# EAGLE board Habit-Reformer (EAGLE 7.3.0)
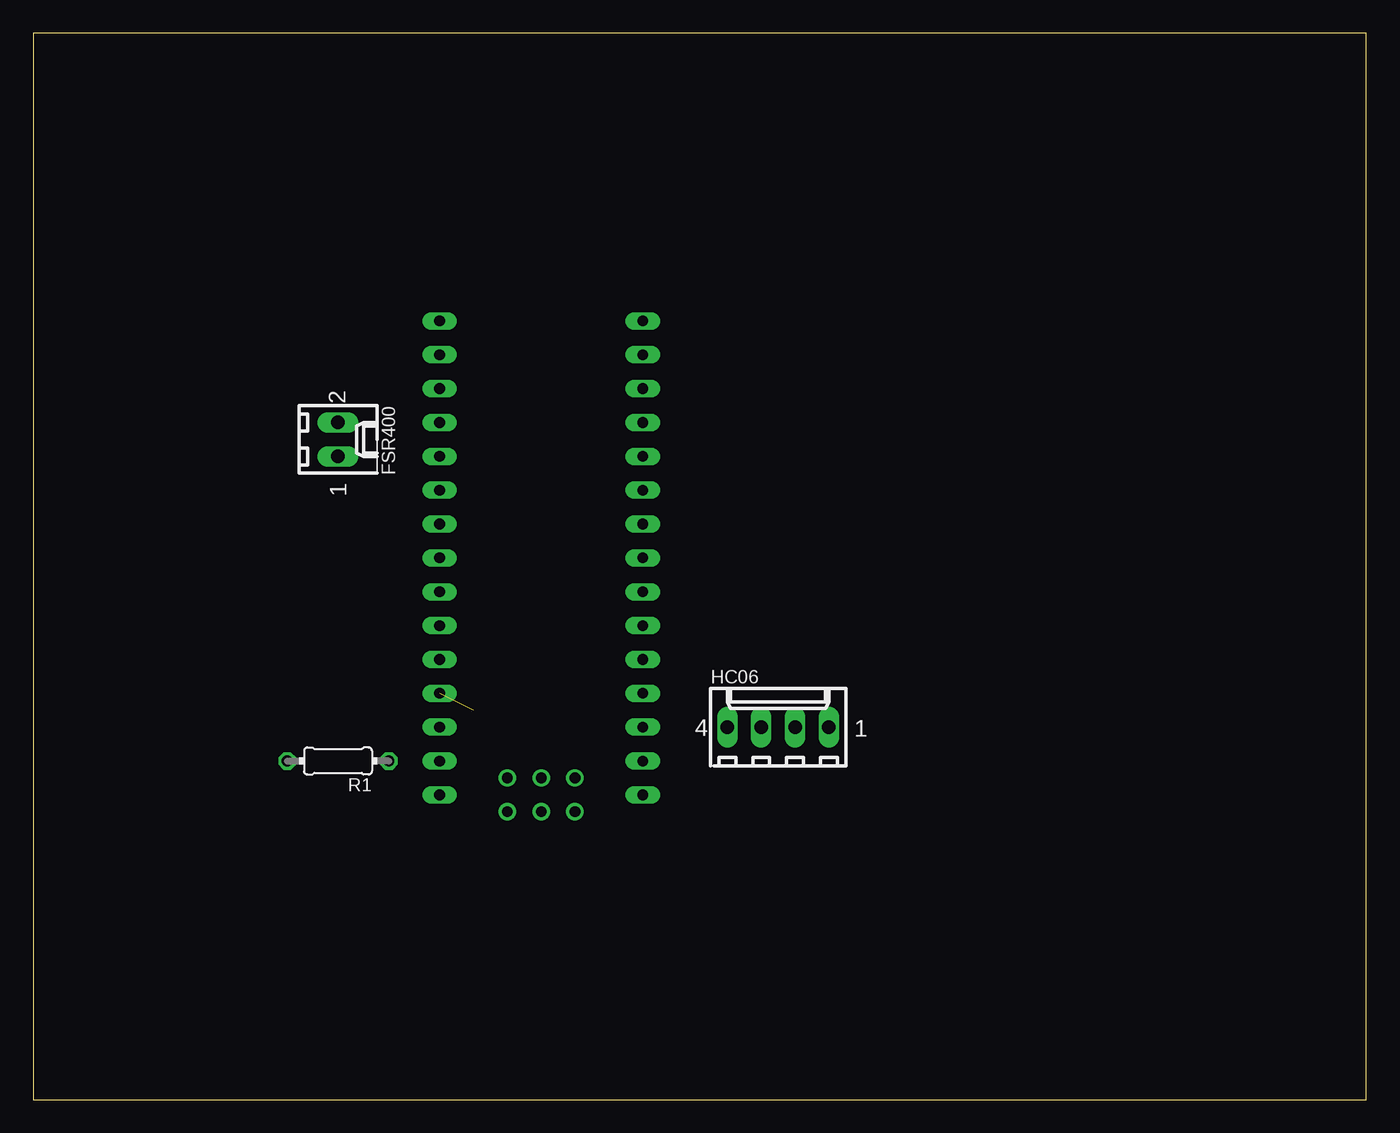
[diagram p0: board, top side]
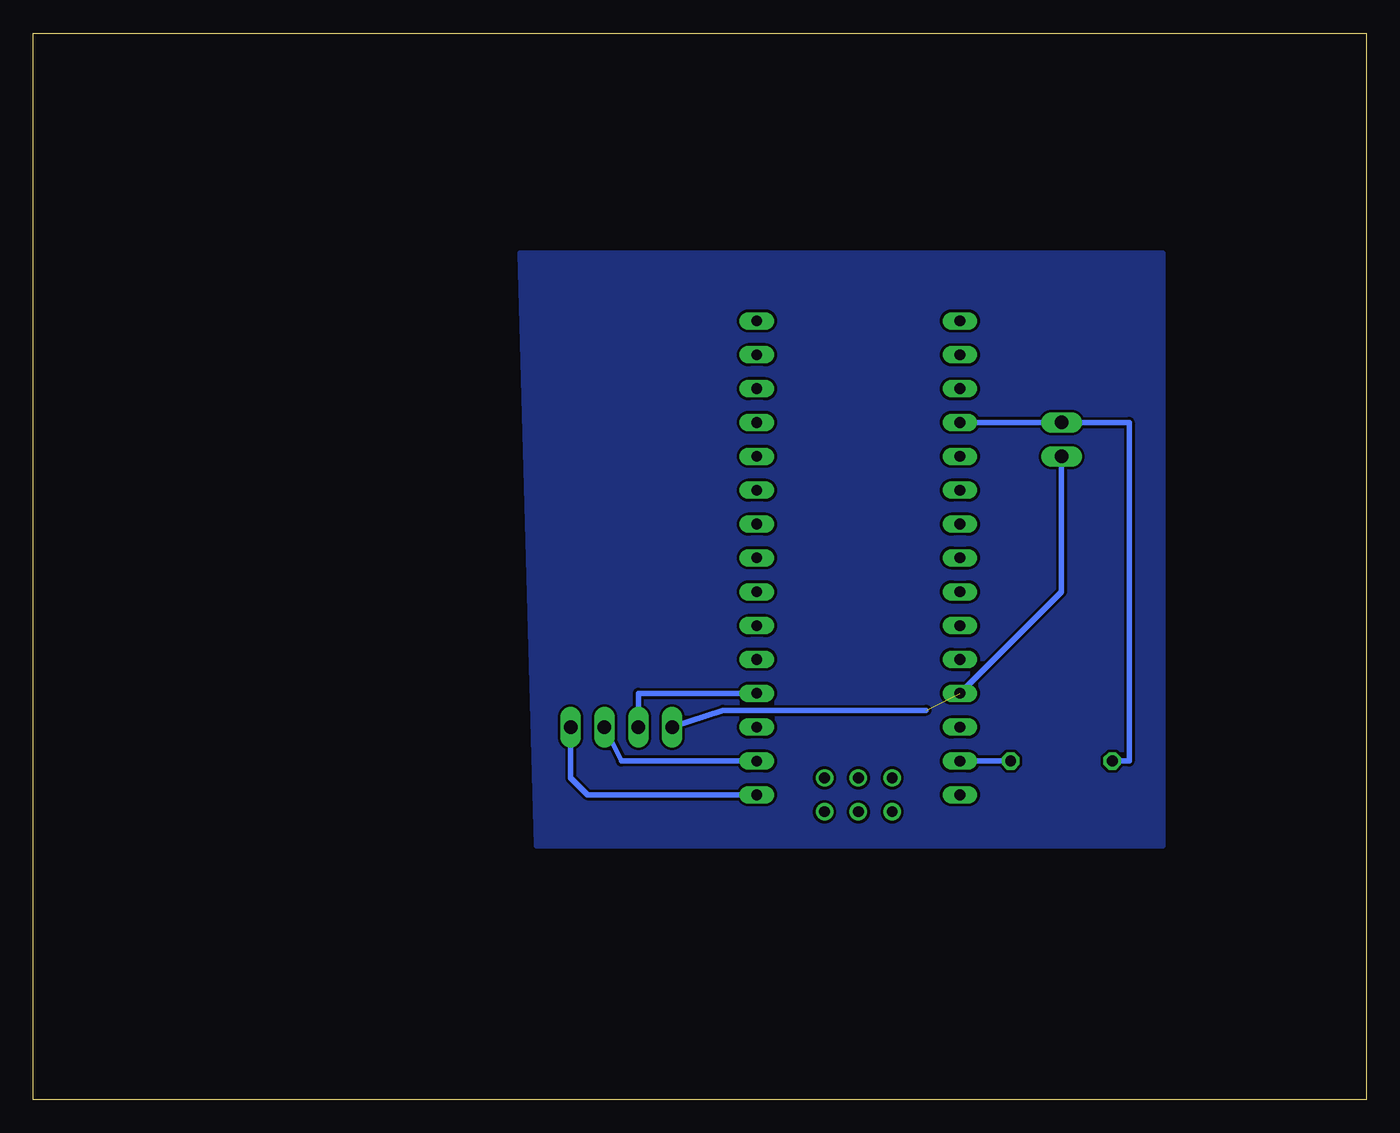
[diagram p1: board, bottom side, seen from below]

Size 100 x 80 mm. Coordinates in mm from the lower left corner, seen from the top.
Outline: 0,0 100,0 100,80 0,80 0,0
Copper layers (1*16): Top 0.035mm / dielectric 1.5mm / Bottom 0.035mm
Design rules "default": minimum track width 10mil, minimum drill 24mil, track to track 8mil, track to pad 8mil, pad to pad 8mil, via to via 8mil, smd to smd 8mil, copper to edge 40mil, drill to drill 8mil, minimum pad ring 10mil, minimum via ring 8mil, stop-mask expansion 4mil, vias tented up to drill 0mil, thermal gap 10mil

## Footprints (pad centres in the part's own frame; a part is rotated, then mirrored left to right if it is on the bottom)
6410-02 = drill 1.016 long: 1 1.27,0; 2 -1.27,0
6410-04 = drill 1.016 long: 1 3.81,0; 2 1.27,0; 3 -1.27,0; 4 -3.81,0
0204/7 = drill 0.813 octagon: 1 -3.81,0; 2 3.81,0
NANO = drill 0.8 long: 3.3V -10.16,24.13; 5V -10.16,-1.27; A0 -10.16,19.05; A1 -10.16,16.51; A2 -10.16,13.97; A3 -10.16,11.43; A4 -10.16,8.89; A5 -10.16,6.35; A6 -10.16,3.81; A7 -10.16,1.27; AREF -10.16,21.59; D2 5.08,1.27; D3 5.08,3.81; D4 5.08,6.35; D5 5.08,8.89; D6 5.08,11.43; D7 5.08,13.97; D8 5.08,16.51; D9 5.08,19.05; D10 5.08,21.59; D11 5.08,24.13; D12 5.08,26.67; D13 -10.16,26.67; GND -10.16,-6.35; GND1 5.08,-1.27; RAW -10.16,-8.89; RST -10.16,-3.81; RST1 5.08,-3.81; RX1 5.08,-6.35; TX0 5.08,-8.89 | drill 0.8: ICSP1 -5.08,-10.16; ICSP2 -5.08,-7.62; ICSP3 -2.54,-10.16; ICSP4 -2.54,-7.62; ICSP5 0,-10.16; ICSP6 0,-7.62

## Placement (x,y rotation side)
FSR400  22-27-2021-02  [6410-02]  22.86,49.53 270 top
HC06  22-27-2041-04  [6410-04]  55.88,27.94 0 top
R1  [0204/7]  22.86,25.4 180 top
U$1  NANO  [NANO]  40.64,31.75 0 top

## Library data of the parts
FSR400 HC06 = con-molex; OC_FARNELL: unknown; OC_NEWARK: unknown
R1 = resistor
U$1 = Arduino-clone

## Nets
N$1: HC06.1 U$1.TX0
N$2: HC06.2 U$1.RX1
N$3: HC06.3 U$1.GND1
N$4: FSR400.1 HC06.4 U$1.5V
N$5: FSR400.2 R1.2 U$1.A0
N$6: R1.1 U$1.GND

## Tracks (layer width: path | path; a pad name or v marks a point on that pad's centre or on a via)
N$1
  Bottom 0.406: HC06.1 59.69,24.13 58.42,22.86 U$1.TX0
N$2
  Bottom 0.406: HC06.2 55.88,25.4 U$1.RX1
N$3
  Bottom 0.406: U$1.GND1 54.61,30.48 HC06.3
N$4  (1 unrouted)
  Bottom 0.406: FSR400.1 22.86,38.1 U$1.5V | HC06.4 48.26,29.21 33.02,29.21
N$5
  Bottom 0.406: U$1.A0 FSR400.2 17.78,50.8 17.78,25.4 R1.2
N$6
  Bottom 0.406: R1.1 U$1.GND
N$7
  pour Bottom: 15.24,63.5 15.24,19.05 62.23,19.05 63.5,63.5